# Altium PCB VatorMonitor.PcbDoc (part 1 of 2)
Units mil, origin at the board's own origin, x right, y up, seen from the top; angles counter-clockwise.
Board outline 6790 x 5680 mil, 2 copper layers (TopLayer, BottomLayer); 187 components, 167 nets, 777 pads, 179 vias.
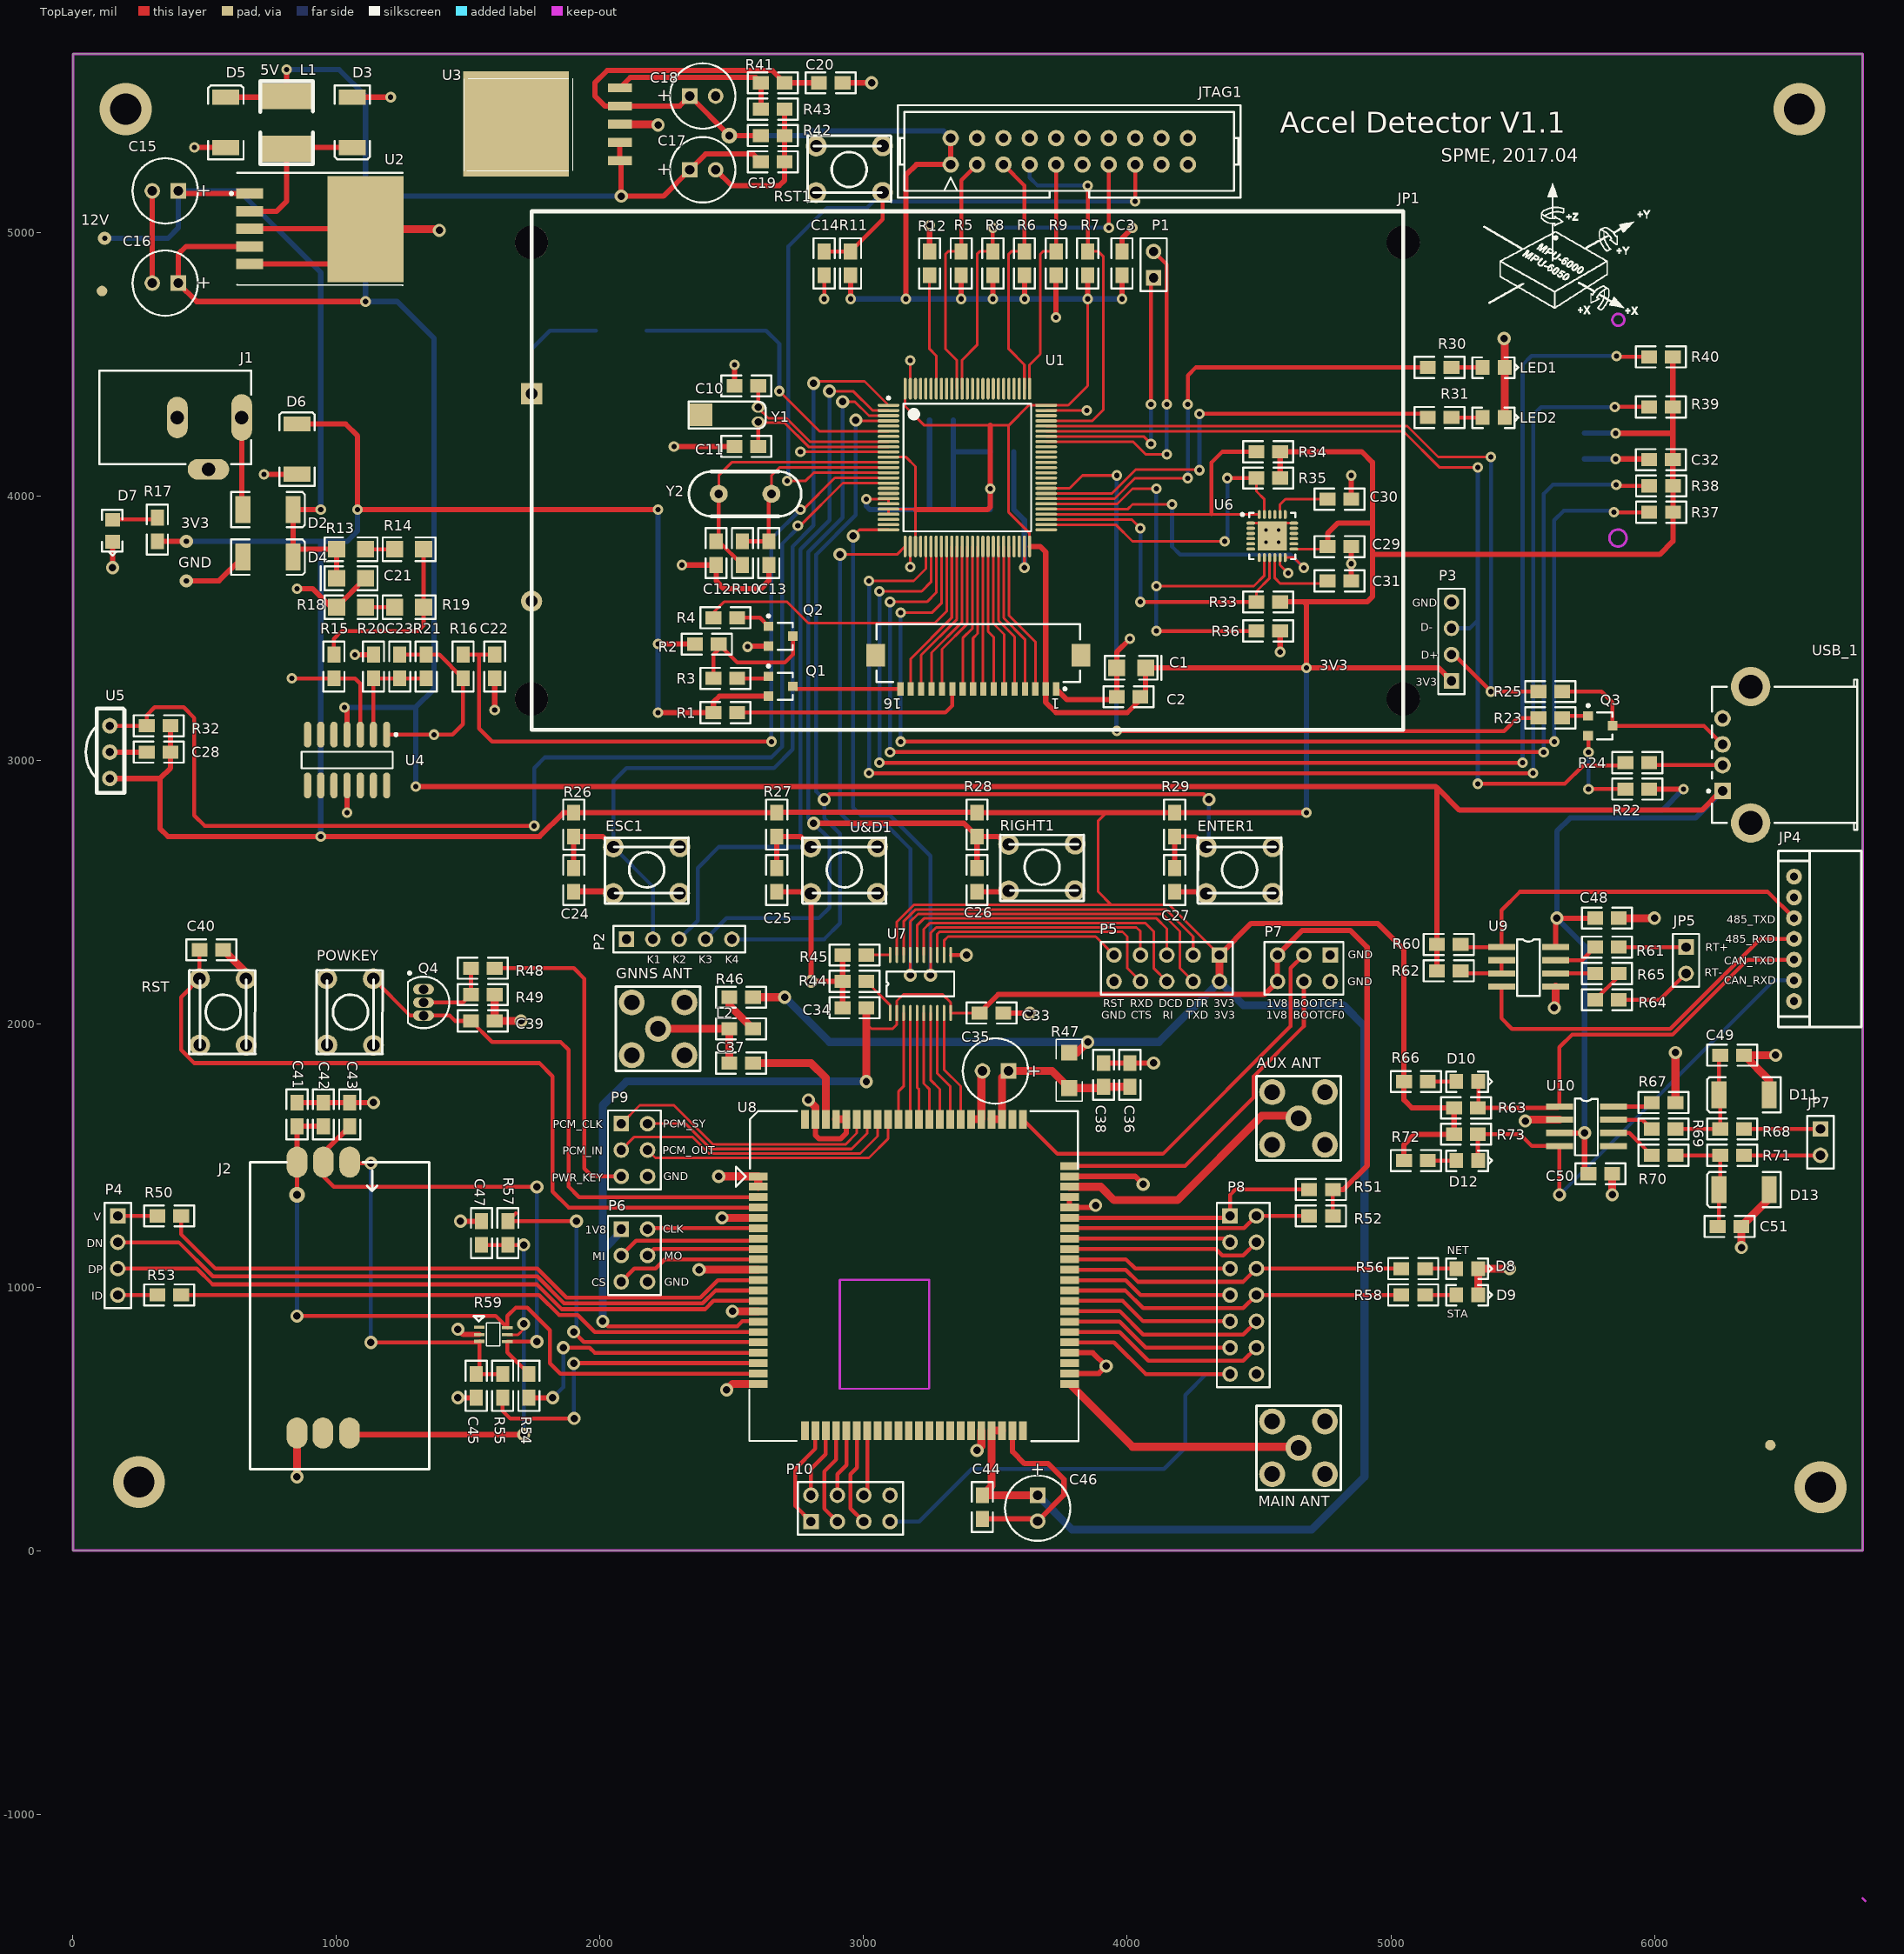
[diagram p0: TopLayer view]
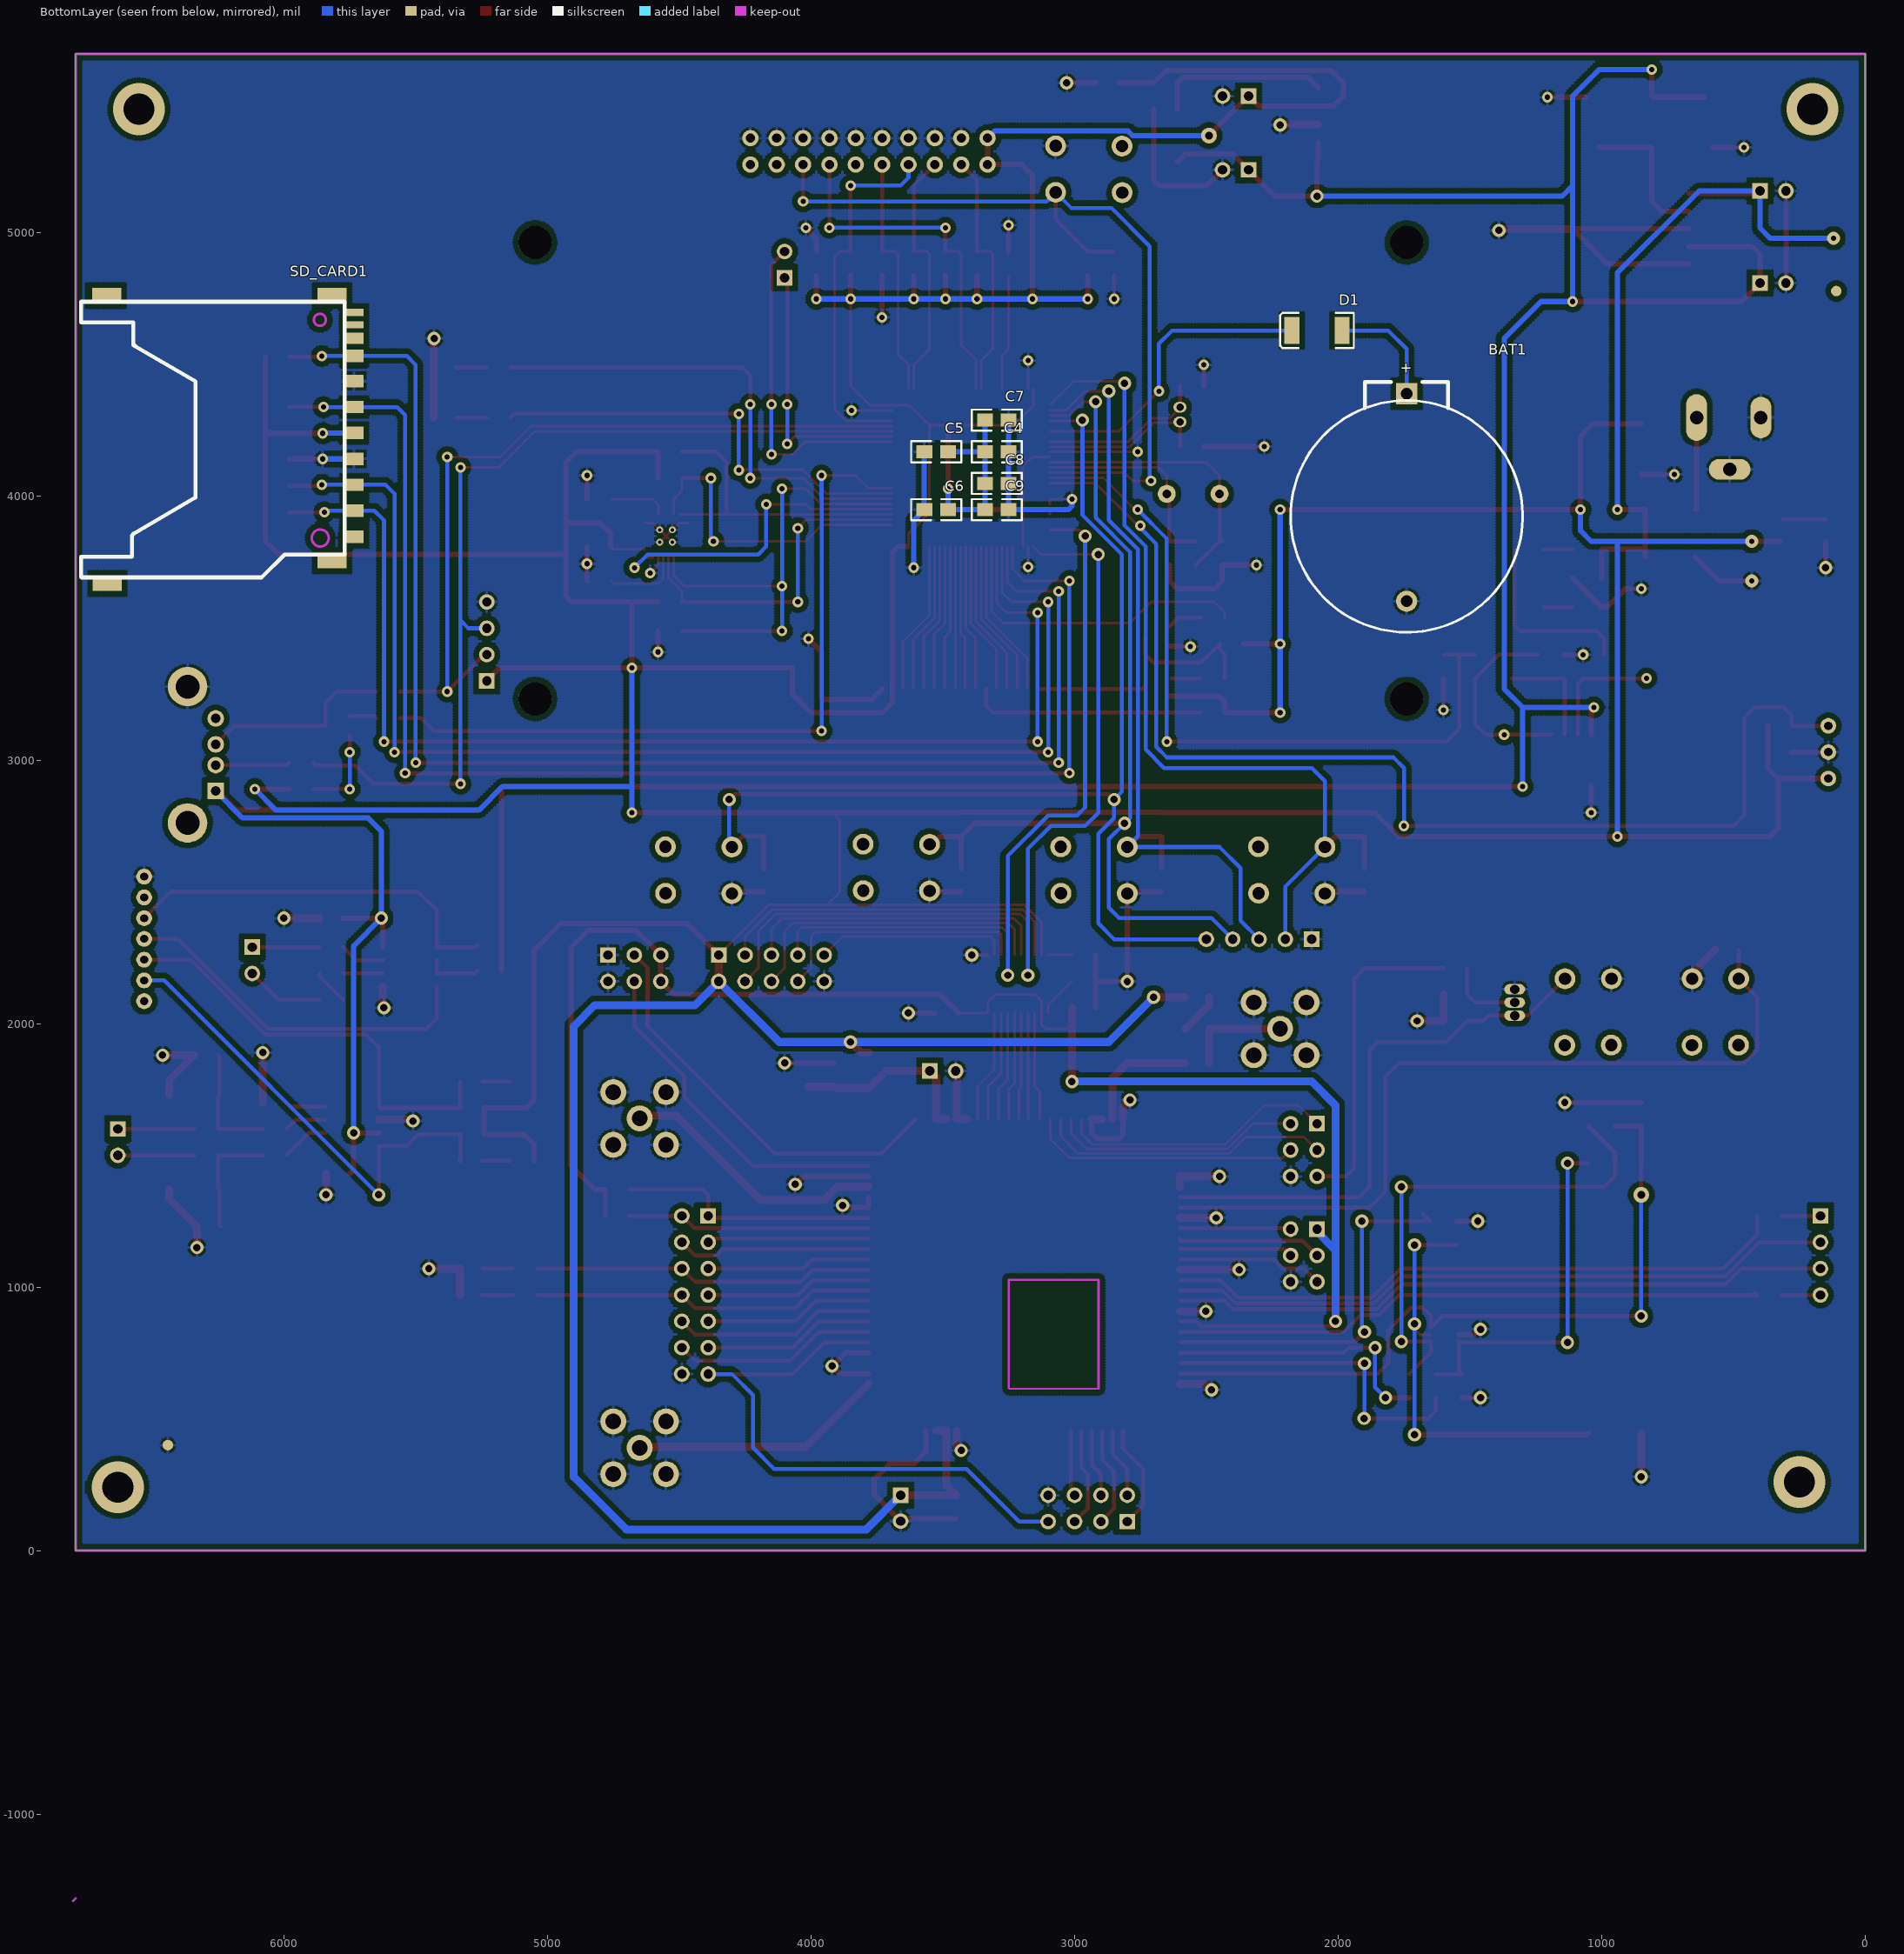
[diagram p1: BottomLayer view, seen from below]

## Layer stack, top to bottom
TopSolder: solder mask 0.4, Solder Resist, Dk 3.5
TopLayer: signal copper 1.4
Dielectric1: core 12.6, FR-4, Dk 4.8
BottomLayer: signal copper 1.4
BottomSolder: solder mask 0.4, Solder Resist, Dk 3.5

## Board outline
0,0 0,5680 6790,5680 6790,0

## Design rules (kind name [scope] priority, off if disabled: settings)
Clearance [All] p1: gap=7
FabricationTestPointUsage TestPointUsage [All] p1: valid=0 allowmultiple=FALSE
FabricationTestpoint Testpoint [All] p1: side=3 testpointundercomponent=TRUE minsize=40 maxsize=100 preferedsize=60 minholesize=20 maxholesize=40 preferedholesize=32 testpointgrid=1 allowsidetop=TRUE allowsidebottom=TRUE usegrid=TRUE gridtolerance=0.01
PolygonConnect [All] p1: connectstyle=Relief reliefconductorwidth=10 reliefentries=4 polygonreliefangle="90 Angle" airgapwidth=10
RoutingVias [All] p1: holewidth=28 width=50 viastyle="Through Hole" minholewidth=28 minwidth=50 maxholewidth=28 maxwidth=50
SolderMaskExpansion [All] p1: expansion=4
Width [All] p1: maxlimit=40 minlimit=10 preferedwidth=10
28 further rules are at their usual default settings.

## Classes and differential pairs
component class SIM7100: "AUX ANT" C33 C34 C35 C36 C37 C38 C39 C40 C41 C42 C43 C44 C45 C46 C47 D8 D9 "GNNS ANT" J2 L2 "MAIN ANT" P4 P5 P6 P7 P8 P9 P10 POWKEY Q4 R44 R45 R46 R47 R48 R49 R50 R51 R52 R53 R54 R55 R56 R57 R58 R59 RST U7 U8
component class LCD: C1 C2 JP1 Q1 Q2 R1 R2 R3 R4
component class LED_KEYBOARD: C24 C25 C26 C27 C28 ENTER1 ESC1 LED1 LED2 P2 R26 R27 R28 R29 R30 R31 R32 RIGHT1 U5 U&D1
component class MCU_DBG: BAT1 C3 C4 C5 C6 C7 C8 C9 C10 C11 C12 C13 C14 D1 JTAG1 P1 R5 R6 R7 R8 R9 R10 R11 R12 RST1 Y1 Y2
component class MCU: P3 U1
component class MPU6000: C29 C30 C31 R33 R34 R35 R36 U6
component class POWER: C15 C16 C17 C18 C19 C20 C21 C22 C23 D2 D3 D4 D5 D6 D7 J1 L1 R13 R14 R15 R16 R17 R18 R19 R20 R21 R41 R42 R43 U2 U3 U4
component class SDCARD: C32 R37 R38 R39 R40 SD_CARD1
component class USB_OTG: C48 C49 C50 C51 D10 D11 D12 D13 JP4 JP5 JP7 Q3 R22 R23 R24 R25 R60 R61 R62 R63 R64 R65 R66 R67 R68 R69 R70 R71 R72 R73 U9 U10 USB_1

## Components (designator, comment, footprint, x,y, rotation, side; value= is the part's Value field where it differs from the comment)
"AUX ANT" "TX-SMA" SMA 4670,1660 r180 top
BAT1 "BATT" Bat2032 1740,4390 r180 bottom
C1 "Cap Pol1" CAP(106C) 4070,3350 r180 top
C2 "Cap" RC0805 4050,3240 r180 top
C3 "Cap" RC0805 3980,4840 r90 top
C4 "Cap" RC0805 3340,4170 r180 bottom
C5 "Cap" RC0805 3480,4170 r0 bottom
C6 "Cap" RC0805 3480,3950 r0 bottom
C7 "Cap" RC0805 3340,4290 r180 bottom
C8 "Cap" RC0805 3340,4050 r180 bottom
C9 "Cap" RC0805 3340,3950 r180 bottom
C10 "Cap" RC0805 2510,4420 r0 top
C11 "Cap" RC0805 2510,4190 r0 top
C12 "Cap" RC0805 2440,3740 r90 top
C13 "Cap" RC0805 2640,3740 r90 top
C14 "Cap" RC0805 2850,4930 r270 top
C15 "100uF" CAP(100uF) 350,5160 r180 top
C16 "407uF" CAP(100uF) 350,4810 r180 top
C17 "407uF" CAP(100uF) 2389.21,5240 r0 top
C18 "407uF" CAP(100uF) 2389.21,5520 r0 top
C19 "Cap" RC0805 2610,5270 r0 top
C20 "Cap" RC0805 2830,5570 r0 top
C21 "Cap Pol1" CAP(106C) 1000,3690 r0 top
C22 "104" RC0805 1600,3400 r270 top
C23 "103" RC0805 1240,3310 r90 top
C24 "Cap" RC0805 1900,2500 r90 top
C25 "Cap" RC0805 2670,2500 r90 top
C26 "Cap" RC0805 3430,2500 r90 top
C27 "Cap" RC0805 4180,2500 r90 top
C28 "Cap" RC0805 280,3030 r0 top
C29 "Cap" RC0805 4850,3810 r180 top
C30 "Cap" RC0805 4760,3990 r0 top
C31 "Cap" RC0805 4850,3680 r180 top
C32 "Cap" RC0805 5980,4140 r0 top
C33 "104" RC0805 3530,2040 r180 top
C34 "105" RC0805 3010,2060 r180 top
C35 "407uF" CAP(100uF) 3500,1820 r180 top
C36 "104" RC0805 4010,1760 r90 top
C37 "33PF" RC0805 2490,1850 r0 top
C38 "105" RC0805 3910,1760 r90 top
C39 "104" RC0805 1510,2010 r0 top
C40 "104" RC0805 480,2280 r0 top
C41 "33pf" RC0805 850,1610 r90 top
C42 "220nf" RC0805 950,1610 r90 top
C43 "22pf" RC0805 1050,1700 r270 top
C44 "104" RC0805 3450,120 r90 top
C45 "22pf" RC0805 1530,580 r90 top
C46 "407uF" CAP(100uF) 3660,160.79 r270 top
C47 "22pf" RC0805 1550,1160 r90 top
C48 "Cap Semi" R/C(0805) 5820,2400 r180 top
C49 "Cap Semi" RC0805 6340,1880 r180 top
C50 "Cap Semi" RC0805 5840,1430 r180 top
C51 "Cap Semi" RC0805 6240,1230 r0 top
D1 "M7" ss14 2080,4630 r0 bottom
D2 "M7" SS14 740,3950 r0 top
D3 "SS14" ss14 1060,5420 r270 top
D4 "M7" SS14 740,3770 r0 top
D5 "M7" SS14 580,5420 r90 top
D6 "M7" ss14 850,4180 r90 top
D7 "LED0" LED-0805 150,3870 r270 top
D8 "LED0" LED-0805 5290,1070 r0 top
D9 "LED0" LED-0805 5290,970 r0 top
D10 "LED" LED-0805 5290,1780 r0 top
D11 "SBMJ7.0A" SS14 6340,1730 r180 top
D12 "LED" LED-0805 5290,1480 r0 top
D13 "SBMJ7.0A" SS14 6340,1370 r180 top
ENTER1 "SW-PB" 小按键 4300,2670 r0 top
ESC1 "SW-PB" 小按键 2050,2670 r0 top
"GNNS ANT" "TX-SMA" SMA 2240,2000 r180 top
J1 "PWR2.5" PWR2.5 640,4300 r0 top
J2 "SIM-F" SIM_FG 950,960 r180 top
JP1 "Header 16" LCD240120 3730,3270 r0 top locked
JP4 "Header 7" Connect_7_2.0_sunway 6785.9,1986.61 r90 top
JP5 "Header 2" HDR1X2 6120,2290 r270 top
JP7 "Header 2" HDR1X2 6630,1600 r270 top
JTAG1 "JTAG" JTAG_20 3780,5310 r0 top
L1 "INDUCTOR" L_151 810,5420 r0 top
L2 "Inductor" RC0805 2580,1980 r180 top
LED1 "LED0" LED-0805 5390,4490 r0 top
LED2 "LED0" LED-0805 5390,4300 r0 top
"MAIN ANT" "TX-SMA" SMA 4670,410 r180 top
P1 "Header 2" HDR1X2 4100,4830 r90 top
P2 "Header 5" HDR1X5 2100,2320 r0 top
P3 "Header 4" HDR1X4 5230,3300 r90 top
P4 "Header 4" HDR1X4 170,1270 r270 top
P5 "Header 5X2" HDR2X5 4350,2260 r180 top
P6 "Header 3X2" HDR2X3 2080,1220 r270 top
P7 "Header 3X2" HDR2X3 4770,2260 r180 top
P8 "Header 7X2" HDR2X7 4390,1270 r270 top
P9 "Header 3X2" HDR2X3 2080,1620 r270 top
P10 "Header 4X2" HDR2X4 2800,110 r0 top
POWKEY "SW-PB" 小按键 1139.21,2170 r270 top
Q1 "2N3906" SOT-23R 2680,3280 r270 top
Q2 "2N3904" SOT-23R 2680,3470 r270 top
Q3 "8550" SOT-23R 5790,3130 r270 top
Q4 "NPN" to-92a 1330,2080 r180 top
R1 "Res1" RC0805 2520,3180 r180 top
R2 "Res1" RC0805 2450,3440 r180 top
R3 "Res1" RC0805 2520,3310 r180 top
R4 "Res1" RC0805 2520,3540 r180 top
R5 "Res1" RC0805 3370,4930 r270 top
R6 "Res1" RC0805 3610,4930 r270 top
R7 "Res1" RC0805 3850,4930 r270 top
R8 "Res1" RC0805 3490,4930 r270 top
R9 "Res1" RC0805 3730,4930 r270 top
R10 "Res1" RC0805 2540,3830 r270 top
R11 "Res1" RC0805 2950,4930 r270 top
R12 "Res1" RC0805 3250,4930 r270 top
R13 "Res1" RC1206 1000,3800 r0 top
R14 "Res1" RC1206 1220,3800 r0 top
R15 "Res1" RC0805 990,3400 r270 top
R16 "Res1" RC0805 1480,3310 r90 top
R17 "Res1" RC0805 320,3830 r90 top
R18 "Res1" RC1206 1000,3580 r0 top
R19 "Res1" RC1206 1220,3580 r0 top
R20 "Res1" RC0805 1140,3400 r270 top
R21 "Res1" RC0805 1340,3310 r90 top
R22 "Res1" RC0805 5980,2890 r180 top
R23 "Res1" RC0805 5560,3160 r0 top
R24 "Res1" RC0805 5980,2990 r180 top
R25 "Res1" RC0805 5650,3260 r180 top
R26 "Res1" RC0805 1900,2800 r270 top
R27 "Res1" RC0805 2670,2800 r270 top
R28 "Res1" RC0805 3430,2800 r270 top
R29 "Res1" RC0805 4180,2800 r270 top
R30 "Res1" RC0805 5230,4490 r180 top
R31 "Res1" RC0805 5230,4300 r180 top
R32 "Res1" RC0805 370,3130 r180 top
R33 "Res1" RC0805 4580,3600 r180 top
R34 "Res1" RC0805 4580,4170 r180 top
R35 "Res1" RC0805 4580,4070 r180 top
R36 "Res1" RC0805 4490,3490 r0 top
R37 "Res1" RC0805 5980.55,3940.47 r0 top
R38 "Res1" RC0805 5980.55,4040.47 r0 top
R39 "Res1" RC0805 5980,4340 r0 top
R40 "Res1" RC0805 5980,4530 r0 top
R41 "Res1" RC0805 2610,5570 r0 top
R42 "Res1" RC0805 2700,5370 r180 top
R43 "Res1" RC0805 2700,5470 r180 top
R44 "Res1" RC0805 2920,2160 r0 top
R45 "Res1" RC0805 3010,2260 r180 top
R46 "Res1" RC0805 2490,2100 r0 top
R47 "Res1" 1206 3780,1890 r270 top
R48 "Res1" RC0805 1600,2210 r180 top
R49 "Res1" RC0805 1600,2110 r180 top
R50 "Res1" RC0805 320,1270 r0 top
R51 "Res1" RC0805 4690,1370 r0 top
R52 "Res1" RC0805 4690,1270 r0 top
R53 "Res1" RC0805 320,970 r0 top
R54 "Res1" RC0805 1730,580 r90 top
R55 "Res1" RC0805 1630,580 r90 top
R56 "Res1" RC0805 5040,1070 r0 top
R57 "Res1" RC0805 1650,1250 r270 top
R58 "Res1" RC0805 5040,970 r0 top
R59 "SMF05C" SOT-363 1600,810 r270 top
R60 "Res2" R/C(0805) 5220,2300 r0 top
R61 "Res2" R/C(0805) 5820,2290 r180 top
R62 "Res2" R/C(0805) 5220,2200 r0 top
R63 "Res2" RC0805 5240,1680 r0 top
R64 "Res2" R/C(0805) 5820,2090 r180 top
R65 "Res2" R/C(0805) 5820,2190 r180 top
R66 "Res2" RC0805 5140,1780 r180 top
R67 "Res2" RC0805 5990,1700 r0 top
R68 "Res2" RC0805 6340,1600 r180 top
R69 "Res2" RC0805 5990,1600 r0 top
R70 "Res2" RC0805 5990,1500 r0 top
R71 "Res2" RC0805 6340,1500 r180 top
R72 "Res2" RC0805 5140,1480 r180 top
R73 "Res2" RC0805 5240,1580 r0 top
RIGHT1 "SW-PB" 小按键 3550,2680 r0 top
RST "SW-PB" 小按键 656.38,2170 r270 top
RST1 "SW-PB" 小按键 3071.58,5154.41 r180 top
SD_CARD1 "sd card" SDCARD_L 5733.35,3946.61 r270 bottom locked
U1 "STM32F103VE" LQFP100_M 3393.27,4110 r0 top locked
U2 "LM2575" LM2575 670,5150 r270 top
U3 "MIC29302" D2PAK 1720,5420 r90 top
U4 "LM324AD" 751A-02_M 1040,3000 r270 top
U5 "HS0038B" HS0038 140,3130 r270 top
U6 "MPU6000" QFN24_M 4550,3850 r0 top locked
U7 "TXB0108RPWR" R-PDSO-20 3100,2040 r90 top
U8 "SIM7100" SIM7100 2600,1420 r0 top
U9 "SN75176AD" SOP8 5420.36,2285 r0 top
U10 "TJA1050" SOP8 5640,1680 r0 top
U&D1 "SW-PB" 小按键 2800,2670 r0 top
USB_1 "USB" USB_A1 6770,3020 r0 top locked
Y1 "32768" XTAL32 2600,4283 r180 top
Y2 "8MHZ" OSC 2550,4010 r0 top

## Footprints (in the part's own frame and the unit in brackets; to place one, negate y for a bottom-side part, rotate by r counter-clockwise, add the part's x,y. Pads: shape width x height; smd on the part's side, far side on the other; paste and mask are expansions set on the pad)
751A-02_M [mm]
  oval 2.5x0.7 smd: 1(-2.45,3.81) 2(-2.45,2.54) 3(-2.45,1.27) 4(-2.45,0) 5(-2.45,-1.27) 6(-2.45,-2.54) 7(-2.45,-3.81) 8(2.45,-3.81) 9(2.45,-2.54) 10(2.45,-1.27) 11(2.45,0) 12(2.45,1.27) 13(2.45,2.54) 14(2.45,3.81)
  silkscreen extent -2.57,-4.4 0.8,4.84
1206 [mil]
  rect 60x60 smd: 1(0,0) 2(135,0)
  silkscreen extent -50,-50 185,50
Bat2032 [mil]
  rect 80x80 hole 45: 1(0,0)
  round 80 hole 45: 2(0,-787.4)
  silkscreen extent -440,-905 440,45
CAP(100uF) [mm]
  rect 1.5x1.5 hole 0.9: 1(-1.25,0)
  round 1.5 hole 0.9: 2(1.25,0)
  silkscreen extent -3.15,-3.15 3.15,3.15
CAP(106C) [mm]
  rect 1.65x1.6 smd: 1(0,0) 2(2.8,0)
  silkscreen extent -1.52,-1.15 3.94,1.14
Connect_7_2.0_sunway [mil]
  round 60 hole 30: 1(98.42,255.9) 2(177.16,255.9) 3(255.9,255.9) 4(334.65,255.9) 5(413.39,255.9) 6(492.13,255.9) 7(570.87,255.9)
  silkscreen extent 0,0 669,315
D2PAK [mil]
  rect 34x90 smd: 1(-145,-355) 2(-76,-355) 3(-7,-355) 4(62,-355) 5(131,-355)
  rect 400x400 smd: ""(-6,39)
  silkscreen extent -185,-177 166,235
HDR1X2 [mm] "Connector; Header; 2 Position"
  rect 1.5x1.5 hole 0.9: 1(0,0)
  round 1.5 hole 0.9: 2(2.54,0)
  silkscreen extent -1.27,-1.27 3.81,1.27
HDR1X4 [mm] "Connector; Header; 4 Position"
  rect 1.5x1.5 hole 0.9: 1(0,0)
  round 1.5 hole 0.9: 2(2.54,0) 3(5.08,0) 4(7.62,0)
  silkscreen extent -1.27,-1.27 8.89,1.27
HDR1X5 [mm]
  rect 1.5x1.5 hole 0.9: 1(0,0)
  round 1.5 hole 0.9: 2(2.54,0) 3(5.08,0) 4(7.62,0) 5(10.16,0)
  silkscreen extent -1.27,-1.27 11.43,1.27
HDR2X3 [mm] "Connector; Header; 3x2 Position"
  rect 1.5x1.5 hole 0.9: 1(0,0)
  round 1.5 hole 0.9: 2(0,2.54) 3(2.54,0) 4(2.54,2.54) 5(5.08,0) 6(5.08,2.54)
  silkscreen extent -1.27,-1.27 6.35,3.81
HDR2X4 [mm] "Connector; Header; 4x2 Position"
  rect 1.5x1.5 hole 0.9: 1(0,0)
  round 1.5 hole 0.9: 2(0,2.54) 3(2.54,0) 4(2.54,2.54) 5(5.08,0) 6(5.08,2.54) 7(7.62,0) 8(7.62,2.54)
  silkscreen extent -1.27,-1.27 8.89,3.81
HDR2X5 [mm] "Connector; Header; 5x2 Position"
  rect 1.5x1.5 hole 0.9: 1(0,0)
  round 1.5 hole 0.9: 2(0,2.54) 3(2.54,0) 4(2.54,2.54) 5(5.08,0) 6(5.08,2.54) 7(7.62,0) 8(7.62,2.54) 9(10.16,0) 10(10.16,2.54)
  silkscreen extent -1.27,-1.27 11.43,3.81
HDR2X7 [mm] "Connector; Header; 7x2 Position"
  rect 1.5x1.5 hole 0.9: 1(0,0)
  round 1.5 hole 0.9: 2(0,2.54) 3(2.54,0) 4(2.54,2.54) 5(5.08,0) 6(5.08,2.54) 7(7.62,0) 8(7.62,2.54) 9(10.16,0) 10(10.16,2.54) 11(12.7,0) 12(12.7,2.54) 13(15.24,0) 14(15.24,2.54)
  silkscreen extent -1.27,-1.27 16.51,3.81
HS0038 [mm]
  round 1.5 hole 0.8: 1(0,0) 2(2.54,0) 3(5.08,0)
  silkscreen extent -1.65,-2.32 6.48,1.4
JTAG_20 [mil]
  round 62 hole 35: 1(-450,-50) 2(-450,50) 3(-350,-50) 4(-350,50) 5(-250,-50) 6(-250,50) 7(-150,-50) 8(-150,50) 9(-50,-50) 10(-50,50) 11(50,-50) 12(50,50) 13(150,-50) 14(150,50) 15(250,-50) 16(250,50) 17(350,-50) 18(350,50) 19(450,-50) 20(450,50)
  silkscreen extent -650,-175 650,175
L_151 [mil]
  rect 188x100 smd: 1(0,-100) 2(0,100)
  silkscreen extent -100,-158 100,157
LCD240120 [mm]
  round 3.2 hole 3.2: 0(-50.553,-0.963) 0(-50.553,43.037) 0(33.447,-0.963) 0(33.447,43.037)
  rect 0.6x1.3 smd: 1(0,0) 2(-1,0) 3(-2,0) 4(-3,0) 5(-4,0) 6(-5,0) 7(-6,0) 8(-7,0) 9(-8,0) 10(-9,0) 11(-10,0) 12(-11,0) 13(-12,0) 14(-13,0) 15(-14,0) 16(-15,0)
  rect 1.8x2.2 smd: 17(-17.4,3.25) 18(2.4,3.25)
  silkscreen extent -50.55,-3.96 33.45,46.04
LED-0805 [mil]
  rect 52x56 smd: 1(-42,0) 2(42,0)
  silkscreen extent -80,-40 94,38
LM2575 [mm]
  rect 1x2.6 smd: 1(0,0) 2(1.7,0) 3(3.4,0) 4(5.1,0) 5(6.8,0)
  rect 10.2x7.3 smd: 6(3.429,11.176)
  silkscreen extent -2,-1.87 8.84,14.73
LQFP100_M [mm]
  oval 2.1x0.3 smd: 1(-7.6,6) 2(-7.6,5.5) 3(-7.6,5) 4(-7.6,4.5) 5(-7.6,4) 6(-7.6,3.5) 7(-7.6,3) 8(-7.6,2.5) 9(-7.6,2) 10(-7.6,1.5) 11(-7.6,1) 12(-7.6,0.5) 13(-7.6,0) 14(-7.6,-0.5) 15(-7.6,-1) 16(-7.6,-1.5) 17(-7.6,-2) 18(-7.6,-2.5) 19(-7.6,-3) 20(-7.6,-3.5) 21(-7.6,-4) 22(-7.6,-4.5) 23(-7.6,-5) 24(-7.6,-5.5) 25(-7.6,-6) 51(7.6,-6) 52(7.6,-5.5) 53(7.6,-5) 54(7.6,-4.5) 55(7.6,-4) 56(7.6,-3.5) 57(7.6,-3) 58(7.6,-2.5) 59(7.6,-2) 60(7.6,-1.5) 61(7.6,-1) 62(7.6,-0.5) 63(7.6,0) 64(7.6,0.5) 65(7.6,1) 66(7.6,1.5) 67(7.6,2) 68(7.6,2.5) 69(7.6,3) 70(7.6,3.5) 71(7.6,4) 72(7.6,4.5) 73(7.6,5) 74(7.6,5.5) 75(7.6,6)
  oval 0.3x2.1 smd: 26(-6,-7.6) 27(-5.5,-7.6) 28(-5,-7.6) 29(-4.5,-7.6) 30(-4,-7.6) 31(-3.5,-7.6) 32(-3,-7.6) 33(-2.5,-7.6) 34(-2,-7.6) 35(-1.5,-7.6) 36(-1,-7.6) 37(-0.5,-7.6) 38(0,-7.6) 39(0.5,-7.6) 40(1,-7.6) 41(1.5,-7.6) 42(2,-7.6) 43(2.5,-7.6) 44(3,-7.6) 45(3.5,-7.6) 46(4,-7.6) 47(4.5,-7.6) 48(5,-7.6) 49(5.5,-7.6) 50(6,-7.6) 76(6,7.6) 77(5.5,7.6) 78(5,7.6) 79(4.5,7.6) 80(4,7.6) 81(3.5,7.6) 82(3,7.6) 83(2.5,7.6) 84(2,7.6) 85(1.5,7.6) 86(1,7.6) 87(0.5,7.6) 88(0,7.6) 89(-0.5,7.6) 90(-1,7.6) 91(-1.5,7.6) 92(-2,7.6) 93(-2.5,7.6) 94(-3,7.6) 95(-3.5,7.6) 96(-4,7.6) 97(-4.5,7.6) 98(-5,7.6) 99(-5.5,7.6) 100(-6,7.6)
  silkscreen extent -7.72,-6.15 6.15,6.82
OSC [mil]
  round 68 hole 32: 1(-100,0) 2(100,0)
  silkscreen extent -213,-85 213,85
PWR2.5 [mm]
  oval 2x4.5 hole 1.3: 1(0,0)
  oval 2x4 hole 1.3: 2(-6.2,0)
  oval 4x2 hole 1.3: 3(-3.2,-5)
  silkscreen extent -13.7,-4.5 0.9,4.5
QFN24_M [mm]
  oval 0.85x0.3 smd: 1(-2.075,1.25) 2(-2.075,0.75) 3(-2.075,0.25) 4(-2.075,-0.25) 5(-2.075,-0.75) 6(-2.075,-1.25) 13(2.075,-1.25) 14(2.075,-0.75) 15(2.075,-0.25) 16(2.075,0.25) 17(2.075,0.75) 18(2.075,1.25)
  oval 0.3x0.85 smd: 7(-1.25,-2.075) 8(-0.75,-2.075) 9(-0.25,-2.075) 10(0.25,-2.075) 11(0.75,-2.075) 12(1.25,-2.075) 19(1.25,2.075) 20(0.75,2.075) 21(0.25,2.075) 22(-0.25,2.075) 23(-0.75,2.075) 24(-1.25,2.075)
  rect 2.8x2.8 smd: 25(0,0)
  silkscreen extent -3,-2.22 2.22,2.22
R-PDSO-20 [mm]
  rect 1.55x0.25 smd: 1(0,0)
  oval 1.55x0.25 smd: 2(0,-0.65) 3(0,-1.3) 4(0,-1.95) 5(0,-2.6) 6(0,-3.25) 7(0,-3.9) 8(0,-4.55) 9(0,-5.2) 10(0,-5.85) 11(5.6,-5.85) 12(5.6,-5.2) 13(5.6,-4.55) 14(5.6,-3.9) 15(5.6,-3.25) 16(5.6,-2.6) 17(5.6,-1.95) 18(5.6,-1.3) 19(5.6,-0.65) 20(5.6,0)
  silkscreen extent 1.61,-6.18 3.99,0.32
R/C(0805) [mil]
  rect 60x50 smd: 1(-45,0) 2(45,0)
  silkscreen extent -95,-40 95,40
RC0805 [mil]
  rect 60x50 smd: 1(0,0) 2(90,0)
  silkscreen extent -50,-40 140,40
RC1206 [mm]
  rect 1.65x1.6 smd: 1(0,0) 2(2.8,0)
  silkscreen extent -1.14,-1.15 3.94,1.14
SDCARD_L [mm]
  rect 1.2x1.8 smd: 1(0,0) 2(-2.489,0) 3(-4.983,-0.009) 4(-7.483,-0.009) 5(-9.983,-0.009) 6(-12.483,-0.009) 7(-14.908,-0.009) 9(2.517,-0.009)
  rect 1.1x1.8 smd: 8(-16.612,0)
  rect 0.7x1.8 smd: 10(-17.908,-0.009) 12(-19.101,0)
  rect 1.5x2.8 smd: 11(-20.726,-23.834) 11(-20.726,-2.143) 11(4.826,-2.143) 11(7.01,-23.784)
  KeepOutLayer circle w0.254: c-18.39,-3.3 r0.58
  KeepOutLayer circle w0.254: c2.642,-3.26 r0.82
  silkscreen extent -20.13,-26.3 6.44,-0.9
SIM7100 [mm]
  rect 1.8x0.75 smd: 1(0,0) 2(0,-1) 3(0,-2) 4(0,-3) 5(0,-4) 6(0,-5) 7(0,-6) 8(0,-7) 9(0,-8) 10(0,-9) 11(0,-10) 12(0,-11) 13(0,-12) 14(0,-13) 15(0,-14) 16(0,-15) 17(0,-16) 18(0,-17) 19(0,-18) 20(0,-19) 41(30,-19) 42(30,-18) 43(30,-17) 44(30,-16) 45(30,-15) 46(30,-14) 47(30,-13) 48(30,-12) 49(30,-11) 50(30,-10) 51(30,-9) 52(30,-8) 53(30,-7) 54(30,-6) 55(30,-5) 56(30,-4) 57(30,-3) 58(30,-2) 59(30,-1) 60(30,0) 81(0,-20) 82(30,-20) 85(30,0.991)
  rect 0.75x1.8 smd: 21(5.5,-24.511) 22(6.5,-24.511) 23(7.5,-24.511) 24(8.5,-24.511) 25(9.5,-24.511) 26(10.5,-24.511) 27(11.5,-24.511) 28(12.5,-24.511) 29(13.5,-24.511) 30(14.5,-24.511) 31(15.5,-24.511) 32(16.5,-24.511) 33(17.5,-24.511) 34(18.5,-24.511) 35(19.5,-24.511) 36(20.5,-24.511) 37(21.5,-24.511) 38(22.5,-24.511) 39(23.5,-24.511) 40(24.5,-24.511) 61(24.5,5.5) 62(23.5,5.5) 63(22.5,5.5) 64(21.5,5.5) 65(20.5,5.5) 66(19.5,5.5) 67(18.5,5.5) 68(17.5,5.5) 69(16.5,5.5) 70(15.5,5.5) 71(14.5,5.5) 72(13.5,5.5) 73(12.5,5.5) 74(11.5,5.5) 75(10.5,5.5) 76(9.5,5.5) 77(8.5,5.5) 78(7.5,5.5) 79(6.5,5.5) 80(5.5,5.5) 83(25.5,-24.511) 84(4.5,-24.511) 86(4.5,5.5) 87(25.5,5.5)
  KeepOutLayer lines w0.203: 7.823,-10.008 7.823,-20.472 16.434,-20.472 ; 7.874,-20.345 7.874,-9.957 16.485,-9.957 16.485,-20.422
  silkscreen extent -2.16,-25.53 30.86,6.3
SIM_FG [mm]
  oval 2x3 smd: 1(2.54,-13.056) 2(0,-13.056) 3(-2.54,-13.056) 5(2.54,13.056) 6(0.051,13.056) 7(-2.515,13.056)
  silkscreen extent -10.21,-13.06 7.06,16.56
SMA [mm]
  round 2.5 hole 1.5: 1(-2.032,3.048) 2(3.048,3.048) 3(0.508,0.508) 4(-2.032,-2.032) 5(3.048,-2.032)
  silkscreen extent -3.56,-3.56 4.57,4.57
SOP8 [mm] "Small Outline; 8 Leads; Body Width 4.3 mm; Pitch 1.27 mm"
  rect 2.6x0.6 smd: 1(-0.009,0.127) 2(-0.009,-1.143) 3(-0.009,-2.413) 4(-0.009,-3.683) 5(5.191,-3.683) 6(5.191,-2.413) 7(5.191,-1.143) 8(5.191,0.127)
  silkscreen extent 1.49,-4.57 3.69,0.89
SOT-23R [mm]
  rect 0.9x0.95 smd: 1(0.95,-1.048) 2(-0.95,-1.048) 3(0,1.302)
  silkscreen extent -2.07,-1.17 1.3,1.3
SOT-363 [mil]
  rect 11.81x40 smd: 1(-37,-58) 2(-10,-58) 3(16,-58) 4(17,48) 5(-9,48) 6(-36,48)
  silkscreen extent -80,-80 33,19
ss14 [mm]
  rect 1.45x2.6 smd: 1(-2.425,0) 2(2.425,0)
  silkscreen extent -3.55,-1.7 3.55,1.7
SS14 [mm]
  rect 1.45x2.6 smd: 1(-2.425,0) 2(2.425,0)
  silkscreen extent -3.55,-1.7 3.55,1.7
to-92a [mm] "TO, Flat Index; 3 In-Line, Axial Leads; Body Dia. 4.5mm; Leads 0.51 x 0.48 mm (max)"
  oval 2x1 hole 0.9: 1(0,-1.27) 2(0,0) 3(0,1.27)
  silkscreen extent -2.48,-2.95 1.5,2.48
USB_A1 [mm]
  rect 1.6x1.6 hole 0.92: 1(-12.99,-3.5)
  round 1.6 hole 0.92: 2(-12.99,-1) 3(-12.99,1) 4(-12.99,3.5)
  round 3.8 hole 2.3: 5(-10.28,6.57) 6(-10.28,-6.57)
  silkscreen extent -14.46,-7.25 0,7.25
XTAL32 [mil]
  oval 50x40 hole 28: 1(0,0) 2(0,-56)
  rect 92.13x86 smd: ""(220,-27)
  silkscreen extent -28,-77 264,25
小按键 [mm]
  round 2 hole 1.2: 1(0,0) 2(0,-4.48) 3(6.41,0.02) 4(6.39,-4.46)
  silkscreen extent -0.82,-5.46 7.25,0.92

## Part data
"AUX ANT" "GNNS ANT" "MAIN ANT": library part "Header 5", "Header, 5-Pin"
BAT1: library part BAT
C1 C21: "Polarized Capacitor (Radial)"
C2 C3 C4 C5 C6 C7 C8 C9 C10 C11 C12 C13 C14 C19 C20 C24 C25 C26 C27 C28 C29 C30 C31 C32: "Capacitor"
C15 C16 C17 C18 C35 C46: library part "Cap Pol1", "Polarized Capacitor (Radial)"
C22 C23 C33 C34 C36 C37 C38 C39 C40 C41 C42 C43 C44 C45 C47: library part CAP, "Capacitor"
C48 C49 C50 C51: "Capacitor (Semiconductor SIM Model)"
D1 D2 D3 D4 D5 D6 D11 D13: library part Diode, "Default Diode"
D7 D8 D9 LED1 LED2: "Typical INFRARED GaAs LED"
D10 D12: library part LED_0805
ENTER1 ESC1 POWKEY RIGHT1 RST RST1 U&D1: "Switch"
J1: "Low Voltage Power Supply Connector"
JP1: "Header, 16-Pin"
JP4: "Header, 7-Pin"
JP5 JP7 P1: "Header, 2-Pin"
P2: "Header, 5-Pin"
P3 P4: "Header, 4-Pin"
P5: "Header, 5-Pin, Dual row"
P6 P7 P9: "Header, 3-Pin, Dual row"
P8: "Header, 7-Pin, Dual row"
P10: "Header, 4-Pin, Dual row"
Q1: "PNP General Purpose Amplifier"
Q2: "NPN General Purpose Amplifier"
Q3: library part PNP, "8550/BCW68"
Q4: library part 2N3904, "NPN General Purpose Amplifier"
R1 R2 R3 R4 R5 R6 R7 R8 R9 R10 R11 R12 R13 R14 R15 R16 R17 R18 R19 R20 R21 R22 R23 R24 R25 R26 R27 R28 R29 R30 R31 R32 R33 R34 R35 R36 R37 R38 R39 R40 R41 R42 R43 R44 R45 R46 R47 R48 R49 R50 R51 R52 R53 R54 R55 R56 R57 R58 R60 R61 R62 R63 R64 R65 R66 R67 R68 R69 R70 R71 R72 R73: "Resistor"
U4: "Quad Low-Power Operational Amplifier"
U10: library part MAX706
USB_1: library part USB5
Y1 Y2: library part XTAL, "Crystal Oscillator"

## Free pads (board coordinates)
  round 40 all layers, no hole: 0(110,4780) 1(6440,400)
  round 60 hole 30: 2(2490,5370) 3(850,1350)

## Via types
v1: diameter 40, hole 20, TopLayer to BottomLayer, 102 vias
v2: diameter 50, hole 28, TopLayer to BottomLayer, 66 vias
v3: diameter 25.98, hole 12.99, TopLayer to BottomLayer, 4 vias
v4: diameter 196.85, hole 118.11, TopLayer to BottomLayer, 4 vias
v5: diameter 50, hole 20, TopLayer to BottomLayer, 3 vias

## Nets (pads, with @x,y where several pads share a name; then routed paths per layer and width w, separated by ;. In a path a pad name is that pad's centre, name@x,y a point inside that pad or via, vN(x,y) a via of type N, cw(c..) or ccw(c..) an arc to the next point about the centre after c; other vN are vias at no path point)
3V3: C1.1 C2.1 C3.1 C4.1 C5.1 C6.1 C7.1 C8.1 C9.1 C18.1 C20.1 C28.2 C29.2 C32.2 C44.2 C46.1 D6.2 JP1.2 JTAG1.1 JTAG1.2 P3.1 P5.1 P5.2 pad.2 Q1.1 R1.2 R2.2 R5.2 R6.2 R7.2 R8.2 R11.2 R17.1 R22.1 R26.1 R27.1 R28.1 R29.1 R32.1 R33.1 R34.1 R35.1 R37.2 R38.2 R39.2 R40.2 R41.2 R42.2 R46.2 R47.1 R63.1 R66.2 R72.2 R73.1 SD_CARD1.4 U1.11 U1.21 U1.22 U1.28 U1.50 U1.75 U1.100 U3.4 U5.3 U6.13 U7.19 U8.38 U8.39 | length 37162
  TopLayer w10: U1.22@3094.06,3932.83 U1.21@3094.06,3952.52 3193.9,3952.52 3196.42,3950 ; U1.11@3094.06,4149.37 3160.63,4149.37 3196.42,4113.58 3196.42,3950 ; U7.19@3125.59,2260.47 3125.59,2385.59 3190,2450 3940,2450 ; U1.100@3157.05,4409.21 3157.05,4342.95 3230,4270 3480,4270 3550,4270 ; U1.28@3196.42,3810.79 3196.42,3950 ; U1.50@3629.49,3810.79 3629.49,3860.51 3550,3940 3550,4270 ; v1(3850,4750) 3850,4420 3776.22,4346.22 U1.75@3692.48,4346.22 3626.22,4346.22 3550,4270 ; 3920,2800 3890,2770 3890,2500 3940,2450 ; P5.1@4350,2260 4160,2450 3940,2450 ; U6.13@4631.69,3800.79 4750.79,3800.79 C29.2@4760,3810
  TopLayer w20: U5.3@140,2930 330,2930 ; R17.1@320,3830 v5(430,3830) ; R32.1@370,3130 C28.2@370,3030 370,2970 330,2930 ; D6.2@850,4275.47 1034.53,4275.47 1080,4230 v1(1080,3950) v1(2220,3950) ; v1(2220,3180) R1.2@2430,3180 2430,3220 2452.6,3242.6 Q1.1@2638.74,3242.6 ; v1(2220,3440) R2.2@2360,3440 ; R42.2@2610,5370 pad.2@2490,5370 C18.1@2340,5520 2302,5482 U3.4@2075,5482 2018,5482 1980,5520 1980,5570 2027,5617 2653,5617 R41.2@2700,5570 C20.1@2830,5570 ; v1(2950,4750) R11.2@2950,4840 ; v1(3160,4750) 3160,5220 3200,5260 JTAG1.1@3330,5260 JTAG1.2@3330,5360 ; 3196.42,3950 3470,3950 3480,3960 v1(3480,4030) 3480,4270 ; v1(3370,4750) R5.2@3370,4840 ; v1(3490,4750) R8.2@3490,4840 ; v1(3610,4750) R6.2@3610,4840 ; U1.50@3632.71,3810.79 3669.21,3810.79 3690.63,3789.37 JP1.2@3690.63,3270 3690.63,3219.37 3730,3180 4000,3180 4070,3250 C1.1@4070,3350 v1(4680,3350) ; C46.1@3640.79,210 C46.1@3650,219.21 ; v1(3850,4750) R7.2@3850,4840 ; v1(3980,4750) C3.1@3980,4840 ; P5.1@4350,2260 4470,2380 4950,2380 5050,2280 R66.2@5050,1780 5050,1710 5080,1680 R63.1@5240,1680 R73.1@5240,1580 5090,1580 5050,1540 R72.2@5050,1480 ; R33.1@4580,3600 4670,3600 ; R35.1@4580,4070 R34.1@4580,4170 4890,4170 4930,4130 4930,3900 ; v1(4680,2800) R29.1@4180,2800 3920,2800 R28.1@3430,2800 3428,2802 2672,2802 R27.1@2670,2800 R26.1@1900,2800 1860,2800 1770,2710 v1(940,2710) 360,2710 330,2740 330,2930 ; C29.2@4760,3810 4760,3860 4800,3900 4930,3900 ; P3.1@5230,3300 5180,3350 v1(4680,3350) ; v1(5852.44,4240) 6070,4240 ; R22.1@5980,2890 v1(6110,2890) ; R38.2@6070,4040.47 C32.2@6070,4140 6070,4240 ; R40.2@6070,4530 R39.2@6070,4340 6070,4240 ; R38.2@6070.55,4040.47 R37.2@6070.55,3940.47 6070.55,3830.55 6020,3780 4930,3780 ; 4670,3600 4680,3590 v1(4680,3350) ; 4670,3600 4910,3600 4930,3620 4930,3780 ; 4930,3780 4930,3900
  TopLayer w30: R46.2@2580,2100 v2(2700,2100) ; U8.39@3525.2,455 U8.38@3485.83,455 3485.83,245.83 C44.2@3450,210 C46.1@3640.79,210 ; R47.1@3780,1890 3810,1890 v2(3850,1930) ; P5.2@4350,2160 P5.1@4350,2260
  BottomLayer w20: v5(430,3830) 940,3830 ; v1(940,2710) 940,3830 ; v1(1080,3950) 1080,3870 1040,3830 940,3830 ; v1(2220,3180) v1(2220,3440) v1(2220,3950) ; pad.2@2490,5370 2780.28,5370 2797.44,5387.16 3302.84,5387.16 JTAG1.2@3330,5360 ; v1(2950,4750) v1(3160,4750) v1(3370,4750) v1(3490,4750) v1(3610,4750) v1(3850,4750) v1(3980,4750) ; C7.1@3340,4290 C4.1@3340,4170 ; v1(3480,4030) C6.1@3480,3950 C9.1@3340,3950 C8.1@3340,4050 C4.1@3340,4170 ; C5.1@3480,4170 C4.1@3340,4170 ; v1(4680,2800) 4680,2900 ; v1(4680,3350) 4680,2900 ; SD_CARD1.4@5733.71,4241.22 5851.22,4241.22 v1(5852.44,4240) ; v1(6110,2890) 6030,2810 5260,2810 5170,2900 4680,2900
  BottomLayer w30: v2(2700,2100) 2870,1930 v2(3850,1930) 4120,1930 P5.2@4350,2160 4440,2070 4820,2070 4900,1990 4900,280 4700,80 3790,80 C46.1@3660,210
5V: C16.1 C17.1 C19.1 C48.2 C50.2 D5.2 L1.2 R60.1 R62.1 U2.4 U3.1 U3.2 U4.4 U9.8 U10.3 USB_1.1 | length 14896.2
  TopLayer w20: D5.2@610,5515.47 805.47,5515.47 L1.2@810,5520 v1(810,5620) ; U2.4@670,4949.21 429.21,4949.21 399.21,4919.21 C16.1@399.21,4810 469.21,4740 v1(1110,4740) ; v1(1030,3200) 1040,3190 U4.4@1040,3096.46 ; v1(1300,2900) 5170,2900 5175,2895 ; U3.2@2075,5344 U3.1@2075,5275 2080,5270 v2(2080,5140) 2240,5140 C17.1@2340,5240 2400,5300 2580,5300 C19.1@2610,5270 ; R62.1@5175,2200 R60.1@5175,2300 5175,2895 ; U9.8@5624.72,2290 5624.72,2394.72 v2(5630,2400) C48.2@5775,2400 ; U10.3@5639.64,1585 v2(5735,1585) 5735,1445 C50.2@5750,1430 ; USB_1.1@6258.58,2882.2 6252.2,2882.2 6180,2810 5260,2810 5175,2895
  BottomLayer w20: v1(810,5620) 1010,5620 1110,5520 1110,5180 ; v1(1030,3200) 1300,3200 ; v1(1300,2900) 1300,3200 ; v2(2080,5140) 1150,5140 1110,5180 ; v2(5735,1585) 5735,2295 v2(5630,2400) 5630,2730 5680,2780 6156.38,2780 USB_1.1@6258.58,2882.2 ; 1110,5180 v1(1110,4740) 1230,4740 1370,4600 1370,3270 1300,3200
12V: C15.1 C21.1 D2.2 D4.2 R13.1 U2.1 | length 2843.6
  TopLayer w20: C15.1@399.21,5160 409.21,5150 U2.1@670,5150 ; D4.2@835.47,3770 D4.2@835.47,3790 ; v1(940,3950) D2.2@835.47,3950 D4.2@835.47,3790 ; C21.1@1000,3690 R13.1@1000,3800 845.47,3800 D4.2@835.47,3790
  BottomLayer w20: v5(120,4980) 360,4980 399.21,5019.21 C15.1@399.21,5160 630,5160 940,4850 v1(940,3950)
485_RXD: JP4.4 U9.4 | length 1387.9
  TopLayer w15: U9.4@5420,2140 5420,2020 5460,1980 6060,1980 6401.26,2321.26 JP4.4@6530,2321.26
485_TXD: JP4.5 R60.2 U9.1 | length 1479.6
  TopLayer w15: R60.2@5265,2300 5275,2290 U9.1@5420,2290 5420,2430 5490,2500 6430,2500 JP4.5@6530,2400
ADC1: P8.10 U8.47 | length 766.1
  TopLayer w15: U8.47@3781.1,908.19 3971.81,908.19 4060,820 4440,820 P8.10@4490,870
ADC2: P8.11 U8.46 | length 639.8
  TopLayer w15: U8.46@3781.1,868.82 3971.18,868.82 4070,770 P8.11@4380,770
AUX_CL: U6.7
AUX_DA: U6.6
BOOT0: R12.2 U1.94 | length 441.2
  TopLayer w10: R12.2@3250,4840 3250,4560 3275.16,4534.84 U1.94@3275.16,4409.21
BOOT_CF0: P7.4 U8.85 | length 1325.7
  TopLayer w15: U8.85@3781.1,1459 3897.28,1459 3897.78,1459.5 4219.5,1459.5 4480,1720 4480,1800 4670,1990 P7.4@4670,2160
BOOT_CF1: P7.3 U8.87 | length 1562
  TopLayer w15: U8.87@3603.94,1636.53 3735.24,1505.24 4135.24,1505.24 4620,1990 4620,2210 P7.3@4670,2260
CAN_RXD: D12.2 JP4.2 R73.2 U10.4 | length 1841.3
  TopLayer w15: D12.2@5330,1482 R73.2@5330,1580 5490,1580 5535,1535 U10.4@5639.64,1535 5639.64,1350.36 v2(5640,1350)
  TopLayer w20: D12.2@5330,1482 D12.2@5332,1480
  BottomLayer w15: v2(5640,1350) 6453.78,2163.78 JP4.2@6530,2163.78
CAN_TXD: D10.2 JP4.3 R63.2 U10.1 | length 1658.3
  TopLayer w15: R63.2@5330,1680 U10.1@5634.64,1680 ; R63.2@5332,1682 D10.2@5332,1780 ; U10.1@5639.64,1685 5639.64,1909.64 5688,1958 6069.11,1958 6353.63,2242.52 JP4.3@6530,2242.52
  TopLayer w20: R63.2@5330,1680 R63.2@5332,1682
CANH: C49.2 D11.2 R68.2 R69.2 | length 454.5
  TopLayer w15: R69.2@6080,1600 R68.2@6250,1600 6250,1724.53 D11.2@6244.53,1730 6244.53,1874.53 C49.2@6250,1880
CANL: C51.1 D13.2 R70.2 R71.2 | length 444.1
  TopLayer w15: R70.2@6080,1500 R71.2@6250,1500 6250,1375.47 D13.2@6244.53,1370 6244.53,1234.53 C51.1@6240,1230
DB0: JP1.10 U1.39 | length 556.2
  TopLayer w10: JP1.10@3375.67,3270 3375.67,3462.72 3412.95,3500 U1.39@3412.95,3810.79
DB1: JP1.9 U1.40 | length 548.1
  TopLayer w10: JP1.9@3415.04,3270 3415.04,3462.4 3432.64,3480 U1.40@3432.64,3810.79
DB2: JP1.8 U1.41 | length 538.7
  TopLayer w10: JP1.8@3452.32,3272.09 U1.41@3452.32,3810.79
DB3: JP1.7 U1.42 | length 549.8
  TopLayer w10: U1.42@3472.01,3810.79 3472.01,3487.99 3493.78,3466.22 JP1.7@3493.78,3270
DB4: JP1.6 U1.43 | length 558
  TopLayer w10: U1.43@3491.69,3810.79 3491.69,3518.31 3533.15,3476.85 JP1.6@3533.15,3270
DB5: JP1.5 U1.44 | length 566.1
  TopLayer w10: U1.44@3511.38,3810.79 3511.38,3528.62 3572.52,3467.48 JP1.5@3572.52,3270
DB6: JP1.4 U1.45 | length 574.3
  TopLayer w10: U1.45@3531.06,3810.79 3531.06,3538.94 3611.89,3458.11 JP1.4@3611.89,3270
DB7: JP1.3 U1.46 | length 582.4
  TopLayer w10: U1.46@3550.75,3810.79 3550.75,3549.25 3651.26,3448.74 JP1.3@3651.26,3270
FIGHTMODE: P8.3 U8.54 | length 614.6
  TopLayer w15: U8.54@3781.1,1183.78 4376.22,1183.78 P8.3@4390,1170